# Altium PCB CAMERON.PcbDoc (part 1 of 2)
Units mil, origin at the board's own origin, x right, y up, seen from the top; angles counter-clockwise.
Board outline 6000 x 4900 mil, 4 copper layers (Top, POWER, GND, Bottom), stack 33.234 mil thick; 130 components, 117 nets, 635 pads, 146 vias.
Unrouted connection lines stored in the file: 34.
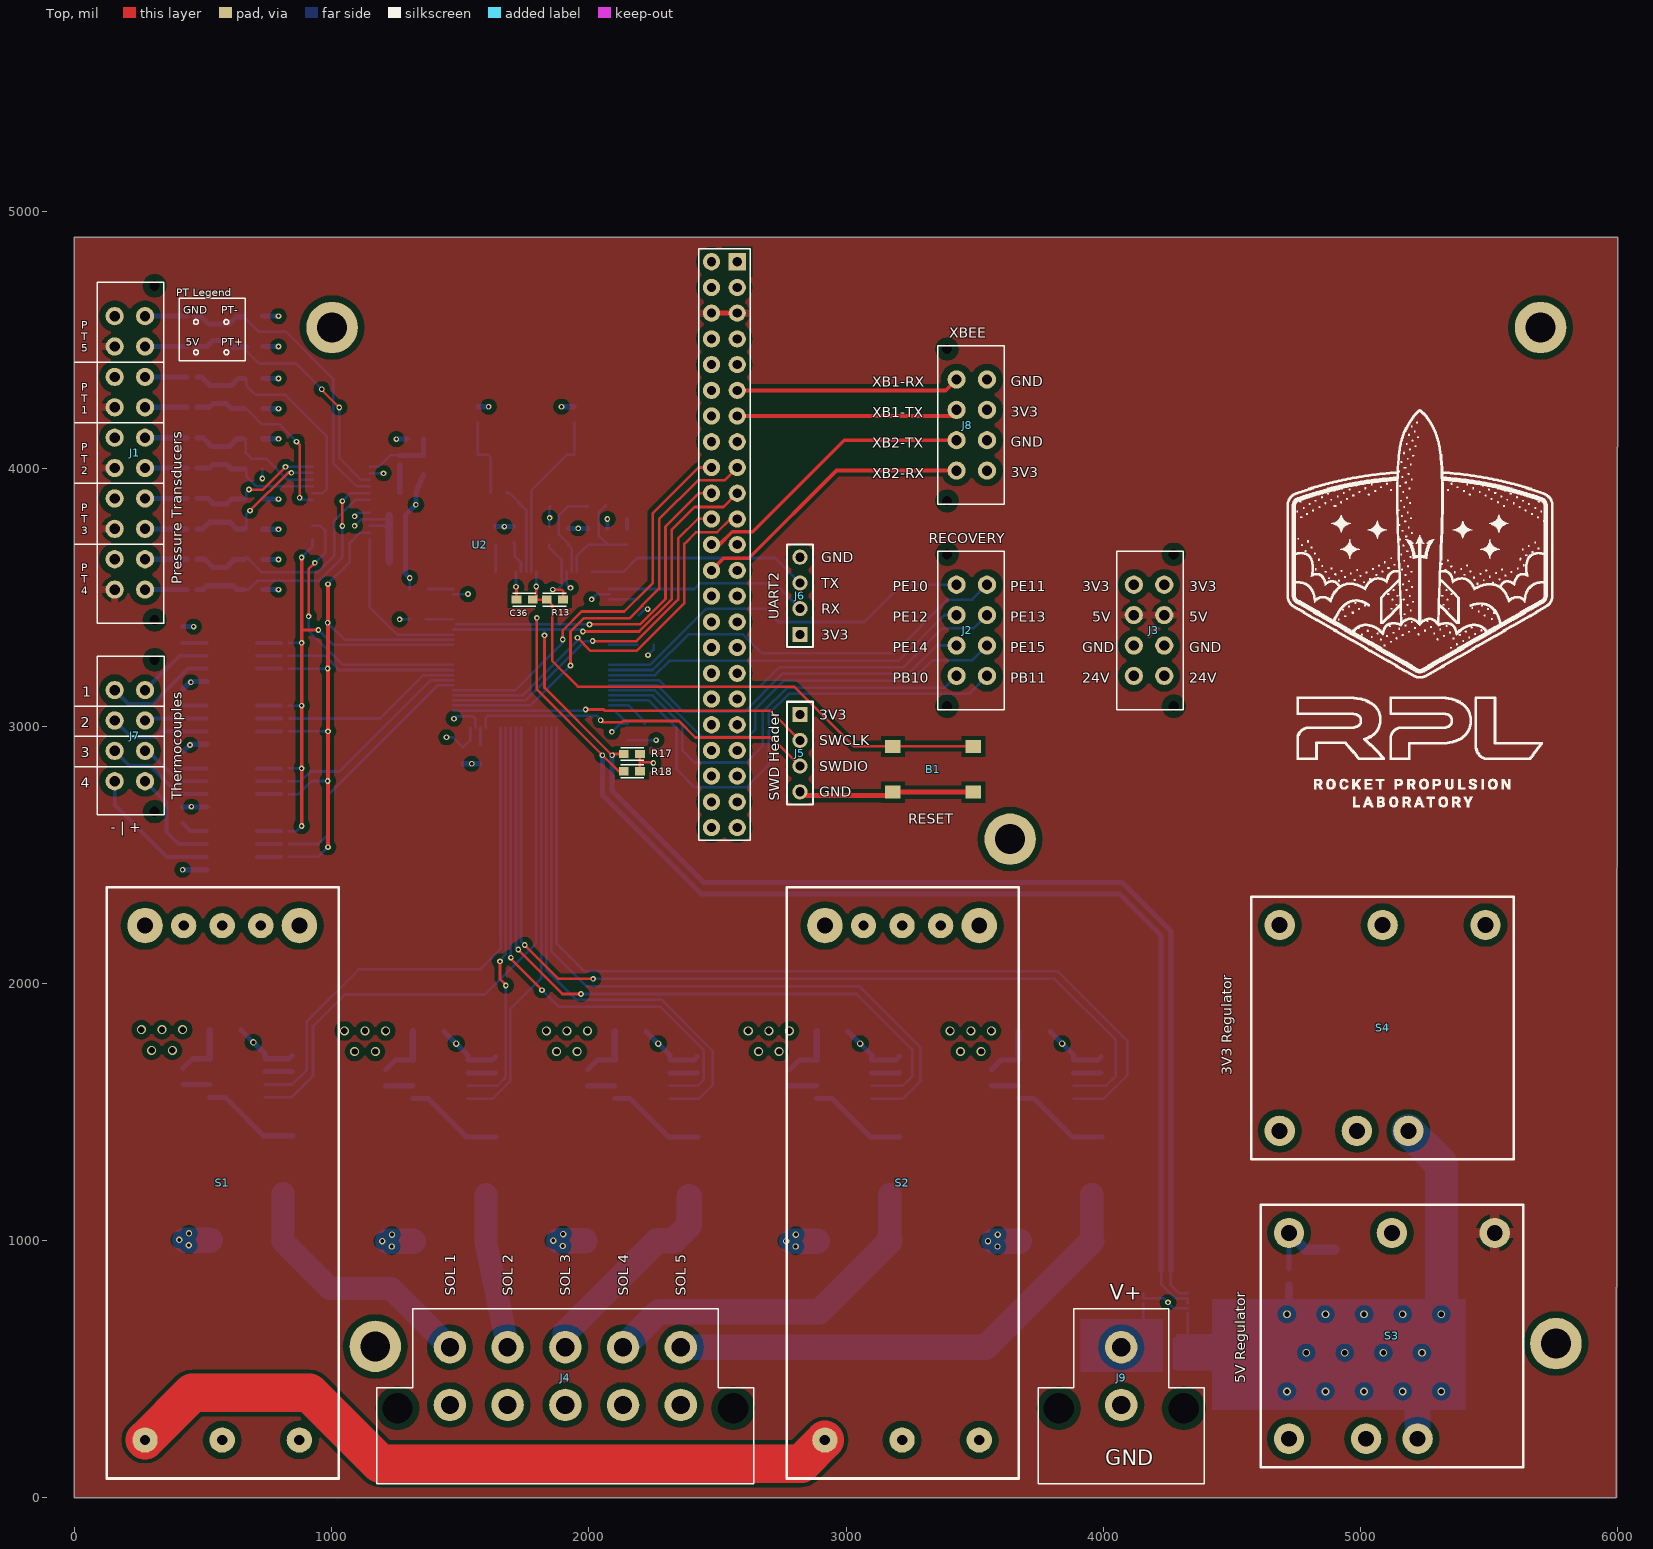
[diagram p0: Top view]
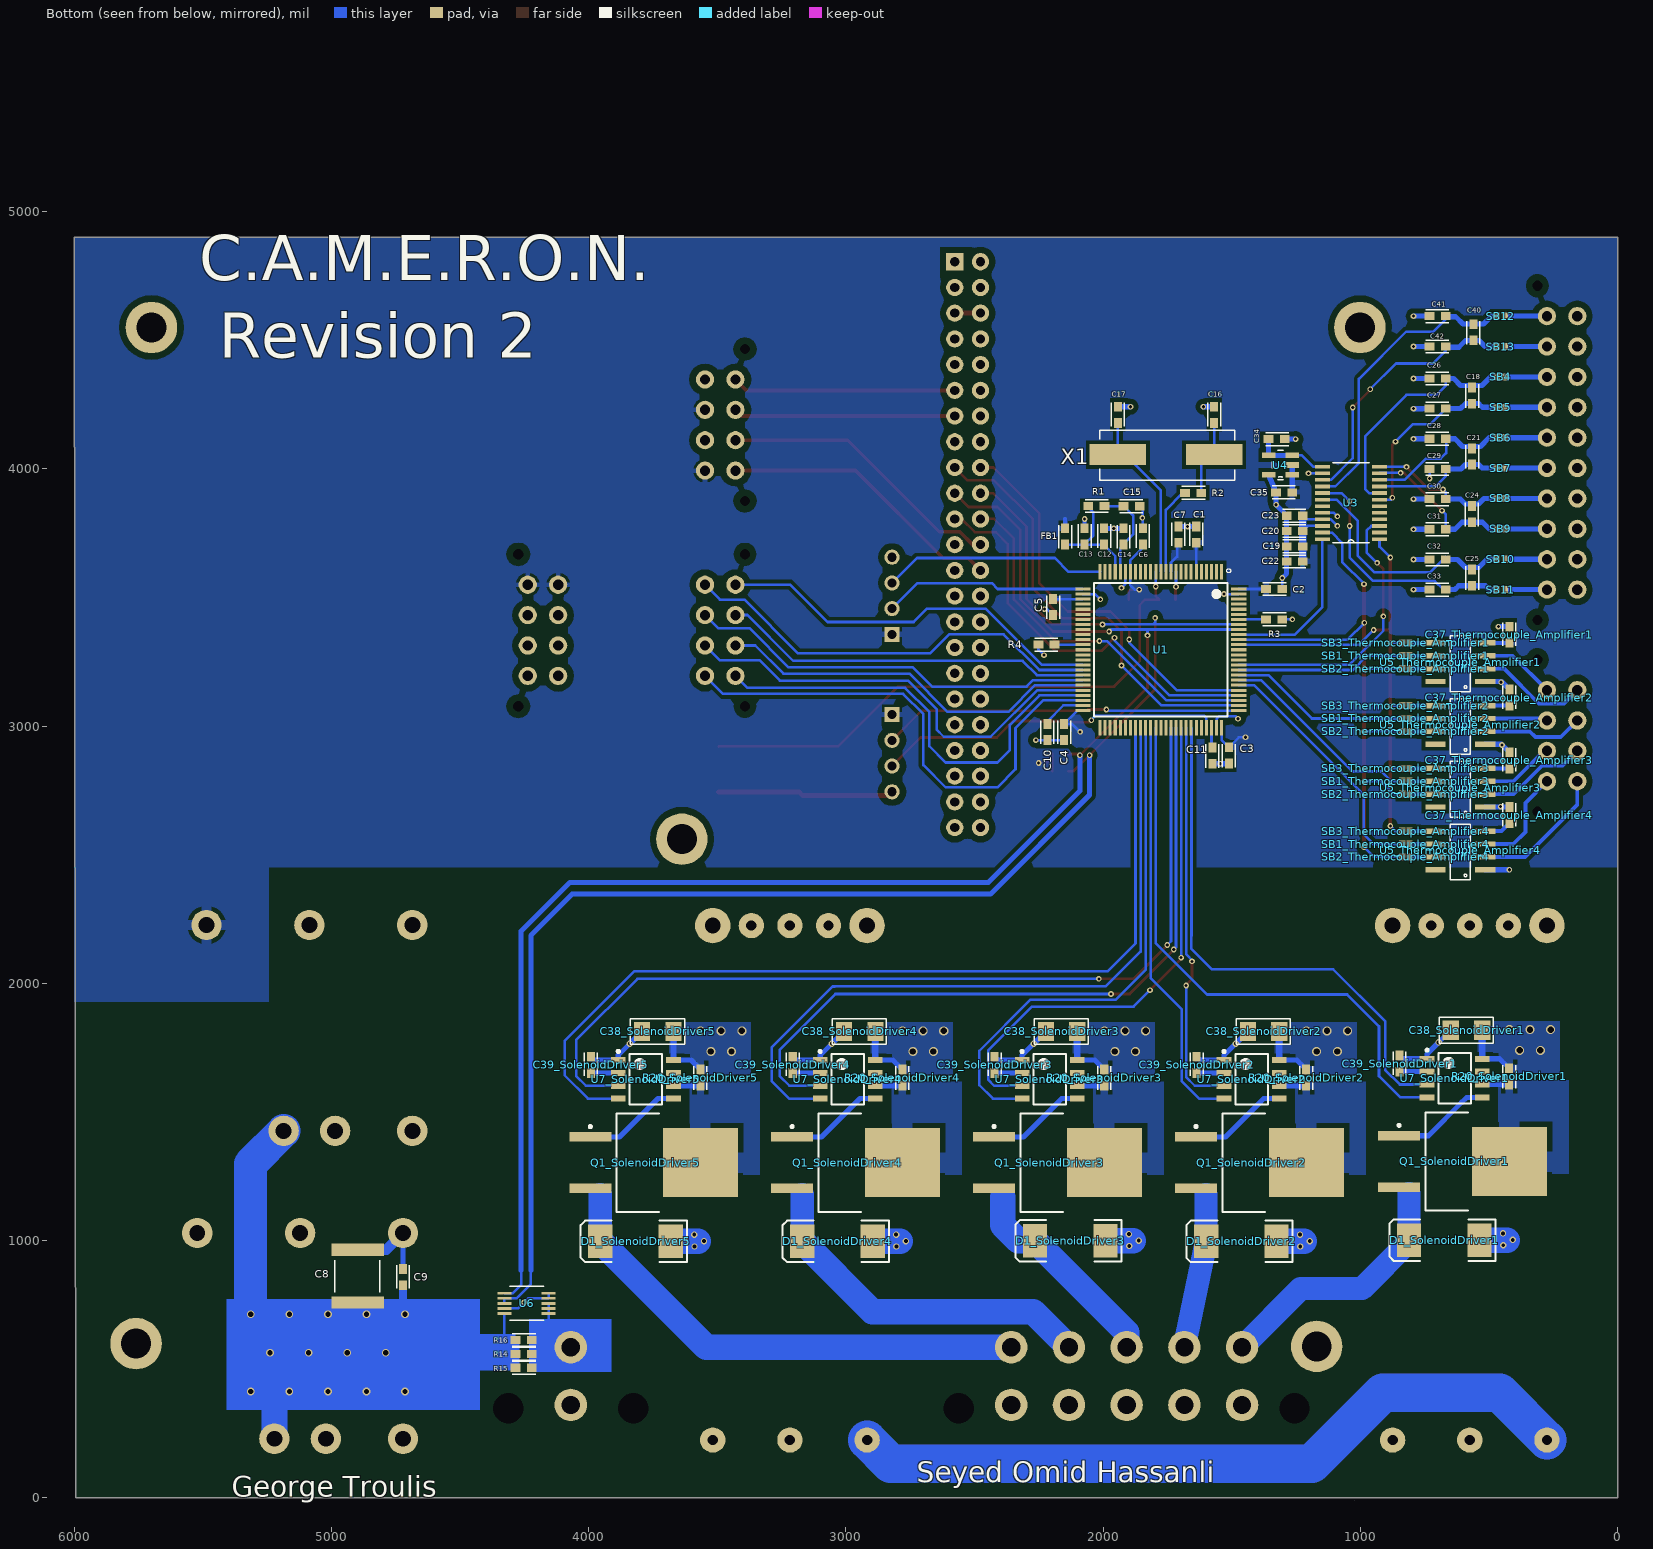
[diagram p1: Bottom view, seen from below]
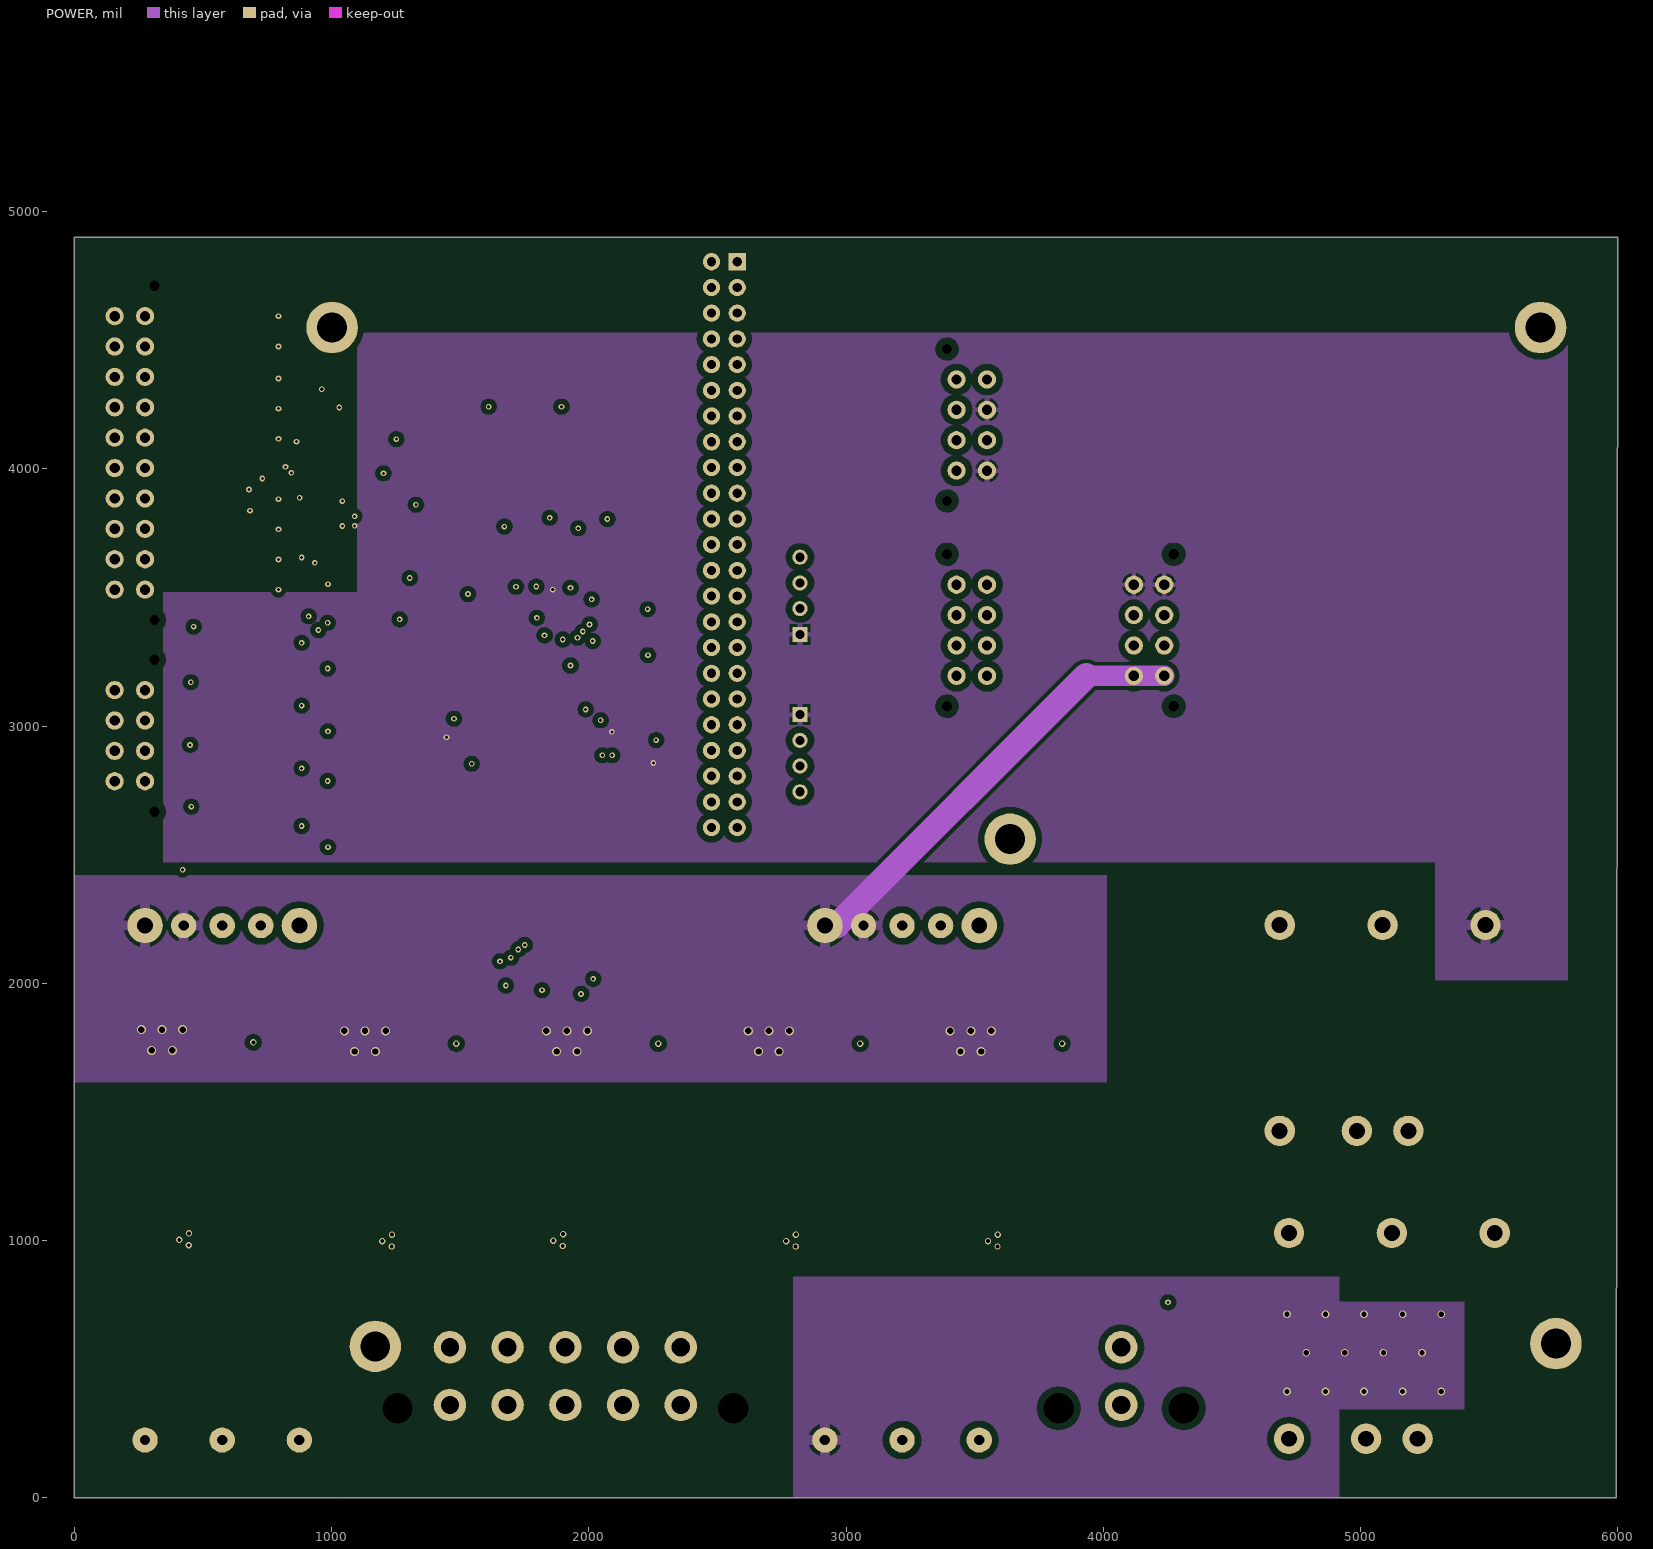
[diagram p2: POWER]
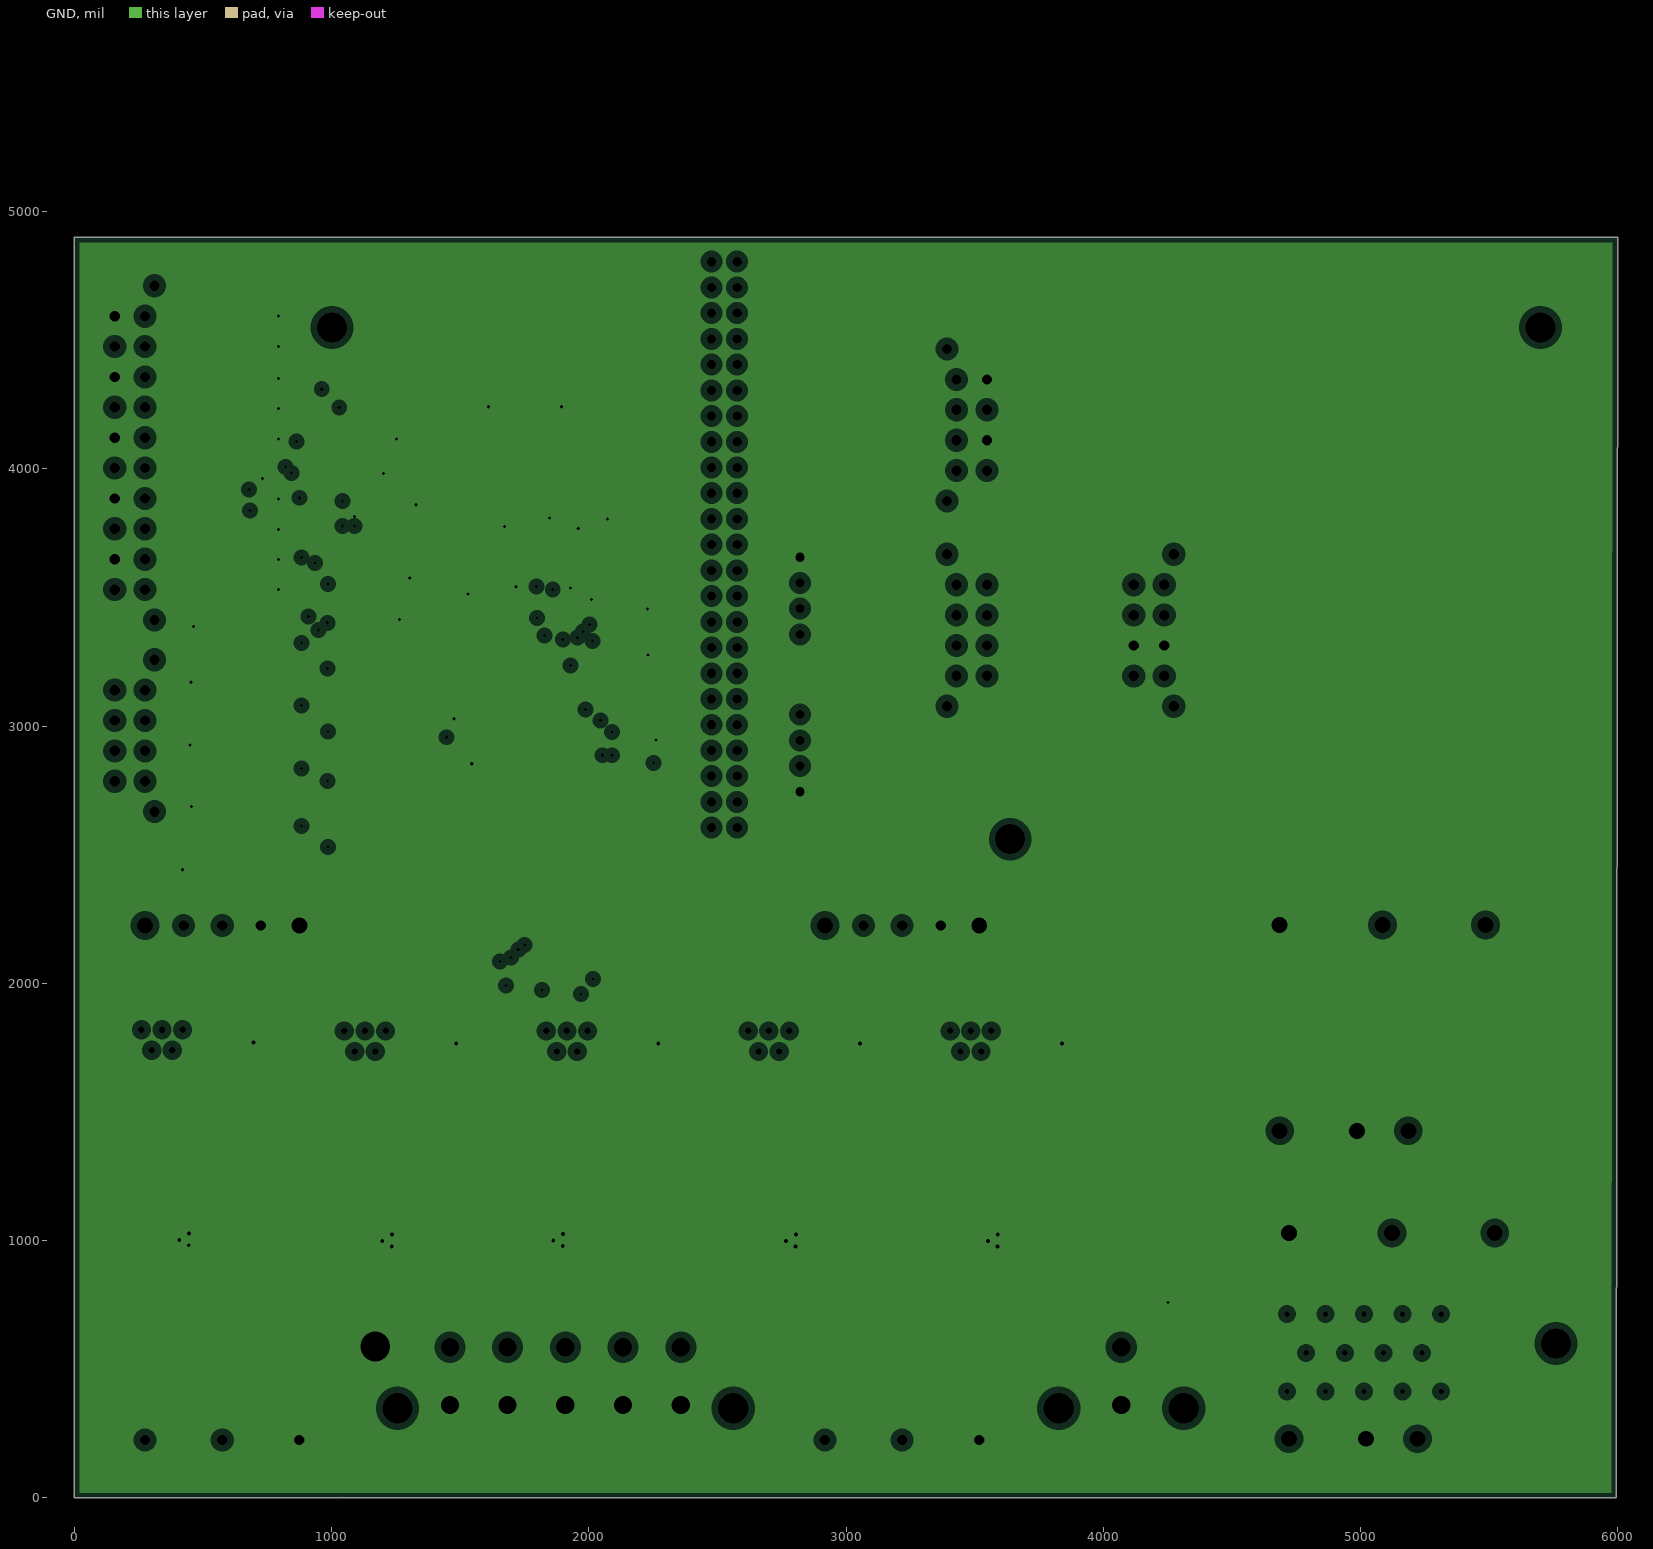
[diagram p3: GND, clearances drawn from the general rule]

## Layer stack, top to bottom
Top Solder: solder mask 0.4, Solder Resist, Dk 3.5
Top: signal copper 1.4
Dielectric 1: core 12.6, FR-4, Dk 4.8
POWER: signal copper 1.417
Dielectric 3: prepreg 5, Dk 4.2
GND: plane copper 1.417, net GND
Dielectric 2: core 10, Dk 4.2
Bottom: signal copper 1.4
Bottom Solder: solder mask 0.4, Solder Resist, Dk 3.5

## Board outline
0,0 0,4900 6000,4900 5995,0
cut-out: 1022,-12

## Design rules (kind name [scope] priority, off if disabled: settings)
Clearance "Stitching 3V3" [IsStitchingVia and InNet('3V3') vs (IsVia and (Not IsStitchingVia)) Or IsPad] p1: gap=5 ignorepadtopadclearanceinfootprint=FALSE
Clearance PolygonClearance [InPolygon] p2: gap=15 ignorepadtopadclearanceinfootprint=TRUE except(20: Via-Fill Via-Poly Via-Region; 25: THPad-Fill THPad-Poly THPad-Region Fill-Hole Poly-Hole Region-Hole)
Clearance [All] p3: gap=5 ignorepadtopadclearanceinfootprint=TRUE except(7: SMDPad-Fill SMDPad-Poly SMDPad-Region; 8: Arc-Fill Arc-Poly Arc-Region Track-Fill Track-Poly Track-Region Via-Fill Via-Poly Via-Region Fill-Fill Fill-Poly Fill-Region Poly-Poly Poly-Region Region-Region; 15: THPad-Fill THPad-Poly THPad-Region Fill-Hole Poly-Hole Region-Hole)
ComponentClearance [All] p1: gap=0 collisioncheckmode=3 verticalgap=0 showdistances=FALSE
HoleSize [All] p1: absolutevalues=TRUE maxlimit=250 minlimit=12 maxpercent=80.000 minpercent=20.000
MinimumAnnularRing [All] p1: minimumring=5
MinimumSolderMaskSliver [All] p1 off: minsoldermaskwidth=5
NetsToIgnore [InNetClass('SOL_FAULT[1..5]')  and InNetClass('SOL_OUT[1..5]')] p1:
PlaneClearance [All] p1: clearance=25
PlaneConnect PlaneConnect_GND [InNet('GND')] p1: pad.planeconnectstyle=Relief pad.reliefexpansion=20 pad.reliefentries=4 pad.reliefconductorwidth=40 pad.reliefairgap=20 via.planeconnectstyle=Direct via.reliefexpansion=20 via.reliefentries=4 via.reliefconductorwidth=40 via.reliefairgap=20
PlaneConnect [All] p2: pad.planeconnectstyle=Relief pad.reliefexpansion=20 pad.reliefentries=4 pad.reliefconductorwidth=30 pad.reliefairgap=20 via.planeconnectstyle=Direct via.reliefexpansion=20 via.reliefentries=4 via.reliefconductorwidth=30 via.reliefairgap=20
PolygonConnect PolygonConnect_MOSFET_Drain [InPadClass('MOSFET_DRAIN')] p1: thpad.connectstyle=Relief thpad.reliefconductorwidth=20 thpad.reliefentries=4 thpad.polygonreliefangle="90 Angle" thpad.airgapwidth=10 smdpad.connectstyle=Relief smdpad.reliefconductorwidth=80 smdpad.reliefentries=4 smdpad.polygonreliefangle="90 Angle" smdpad.airgapwidth=20 via.connectstyle=Direct via.reliefconductorwidth=20 via.reliefentries=4 via.polygonreliefangle="90 Angle" via.airgapwidth=10
PolygonConnect PolygonConnect_HiCurrent [InPadClass('REGULATORS_SOURCE')] p2: thpad.connectstyle=Relief thpad.reliefconductorwidth=40 thpad.reliefentries=4 thpad.polygonreliefangle="90 Angle" thpad.airgapwidth=15 smdpad.connectstyle=Relief smdpad.reliefconductorwidth=20 smdpad.reliefentries=4 smdpad.polygonreliefangle="90 Angle" smdpad.airgapwidth=10 via.connectstyle=Direct via.reliefconductorwidth=20 via.reliefentries=4 via.polygonreliefangle="90 Angle" via.airgapwidth=10
PolygonConnect PolygonConnect_3V3 [InNet('3V3')] p3: thpad.connectstyle=Relief thpad.reliefconductorwidth=20 thpad.reliefentries=4 thpad.polygonreliefangle="90 Angle" thpad.airgapwidth=10 smdpad.connectstyle=Relief smdpad.reliefconductorwidth=20 smdpad.reliefentries=4 smdpad.polygonreliefangle="90 Angle" smdpad.airgapwidth=10 via.connectstyle=Direct via.reliefconductorwidth=20 via.reliefentries=4 via.polygonreliefangle="90 Angle" via.airgapwidth=10
PolygonConnect [All] p4: thpad.connectstyle=Relief thpad.reliefconductorwidth=30 thpad.reliefentries=4 thpad.polygonreliefangle="90 Angle" thpad.airgapwidth=15 smdpad.connectstyle=Relief smdpad.reliefconductorwidth=30 smdpad.reliefentries=4 smdpad.polygonreliefangle="90 Angle" smdpad.airgapwidth=15 via.connectstyle=Direct via.reliefconductorwidth=30 via.reliefentries=4 via.polygonreliefangle="90 Angle" via.airgapwidth=15
RoomDefinition SolenoidDriver5 [InComponentClass('SolenoidDriver5')] p1: confinementstyle=ConfineIn formatcopy=TRUE lockcomponents=FALSE outline 4101.13,1890.28 3326.13,1890.28 3326.13,873.28 4101.13,873.28
RoomDefinition SolenoidDriver4 [InComponentClass('SolenoidDriver4')] p2: confinementstyle=ConfineIn formatcopy=TRUE lockcomponents=FALSE outline 3316.13,1890.28 2541.13,1890.28 2541.13,873.28 3316.13,873.28
RoomDefinition SolenoidDriver3 [InComponentClass('SolenoidDriver3')] p3: confinementstyle=ConfineIn formatcopy=TRUE lockcomponents=FALSE outline 2531.13,1890.28 1756.13,1890.28 1756.13,873.28 2531.13,873.28
RoomDefinition SolenoidDriver2 [InComponentClass('SolenoidDriver2')] p4: confinementstyle=ConfineIn formatcopy=TRUE lockcomponents=FALSE outline 1746.13,1890.28 971.13,1890.28 971.13,873.28 1746.13,873.28
RoomDefinition SolenoidDriver1 [InComponentClass('SolenoidDriver1')] p5: confinementstyle=ConfineIn formatcopy=FALSE lockcomponents=FALSE outline 957.13,1895 182.13,1895 182.13,878 957.13,878
RoutingVias [All] p1: holewidth=10 width=15 viastyle="Through Hole" minholewidth=8 minwidth=12 maxholewidth=50 maxwidth=100
SilkToSilkClearance [All] p1: silktosilkclearance=1
SilkToSolderMaskClearance [IsPad] p1: minsilkscreentomaskgap=5 clearancetoexposedcopper=TRUE
SolderMaskExpansion [All] p1: expansion=5
UnRoutedNet [All] p1: checkbadconnections=TRUE
Width [All] p1: maxlimit=200 minlimit=5 preferedwidth=10
22 further rules are at their usual default settings.

## Classes and differential pairs
pad class REGULATORS_SOURCE: S1-1 S1-7 S1-8 S2-1 S2-7 S2-8 S3-3 S4-3
pad class MOSFET_DRAIN: Q1_SolenoidDriver1-2 Q1_SolenoidDriver2-2 Q1_SolenoidDriver3-2 Q1_SolenoidDriver4-2 Q1_SolenoidDriver5-2
component class Recovery: J2 J3
net class SOL_PWR[1..5]: SOL_PWR1 SOL_PWR2 SOL_PWR3 SOL_PWR4 SOL_PWR5
net class SOL_OUT[1..5]: SOL_OUT1 SOL_OUT2 SOL_OUT3 SOL_OUT4 SOL_OUT5
net class SOL_FAULT[1..5]: SOL_FAULT1 SOL_FAULT2 SOL_FAULT3 SOL_FAULT4 SOL_FAULT5
component class Solenoids: J4
net class TC_CS[1..4]: TC_CS1 TC_CS2 TC_CS3 TC_CS4
net class T-[1..4]: T-1 T-2 T-3 T-4
net class T+[1..4]: T+1 T+2 T+3 T+4
channel class Solenoid_Driver: SolenoidDriver1 SolenoidDriver2 SolenoidDriver3 SolenoidDriver4 SolenoidDriver5 SolenoidDriver6 SolenoidDriver7
component class "XBee Radio": J8
component class Debugging/Programming: B1 C36 J5 J6 R13
component class SolenoidDriver5: C38_SolenoidDriver5 C39_SolenoidDriver5 D1_SolenoidDriver5 Q1_SolenoidDriver5 R20_SolenoidDriver5 R25 U5_SolenoidDriver5 U7_SolenoidDriver5
component class SolenoidDriver4: C38_SolenoidDriver4 C39_SolenoidDriver4 D1_SolenoidDriver4 Q1_SolenoidDriver4 R20_SolenoidDriver4 R25 U5_SolenoidDriver4 U7_SolenoidDriver4
component class SolenoidDriver3: C38_SolenoidDriver3 C39_SolenoidDriver3 D1_SolenoidDriver3 Q1_SolenoidDriver3 R20_SolenoidDriver3 R25 U5_SolenoidDriver3 U7_SolenoidDriver3
component class SolenoidDriver2: C38_SolenoidDriver2 C39_SolenoidDriver2 D1_SolenoidDriver2 Q1_SolenoidDriver2 R20_SolenoidDriver2 R25 U5_SolenoidDriver2 U7_SolenoidDriver2
component class SolenoidDriver1: C38_SolenoidDriver1 C39_SolenoidDriver1 D1_SolenoidDriver1 Q1_SolenoidDriver1 R20_SolenoidDriver1 R25 U5_SolenoidDriver1 U7_SolenoidDriver1
component class RIO_MCU: U1
component class "Pressure Transducers": C18 C19 C20 C21 C22 C23 C24 C25 C26 C27 C28 C29 C30 C31 C32 C33 C34 C35 C40 C41 C42 J1 SB4 SB5 SB6 SB7 SB8 SB9 SB10 SB11 SB12 SB13 U3 U4
component class Power_Monitor: J9 R14 R15 R16 R17 R18 U6
component class "Flight Computer": U2
channel class Thermocouple_Amplifier: Thermocouple_Amplifier1 Thermocouple_Amplifier2 Thermocouple_Amplifier3 Thermocouple_Amplifier4
component class Thermocouple_Amplifier4: C37_Thermocouple_Amplifier4 C? SB1_Thermocouple_Amplifier4 SB2_Thermocouple_Amplifier4 SB3_Thermocouple_Amplifier4 U5_Thermocouple_Amplifier4
component class Thermocouple_Amplifier3: C37_Thermocouple_Amplifier3 C? SB1_Thermocouple_Amplifier3 SB2_Thermocouple_Amplifier3 SB3_Thermocouple_Amplifier3 U5_Thermocouple_Amplifier3
component class Thermocouple_Amplifier2: C37_Thermocouple_Amplifier2 C? SB1_Thermocouple_Amplifier2 SB2_Thermocouple_Amplifier2 SB3_Thermocouple_Amplifier2 U5_Thermocouple_Amplifier2
component class Thermocouple_Amplifier1: C37_Thermocouple_Amplifier1 C? SB1_Thermocouple_Amplifier1 SB2_Thermocouple_Amplifier1 SB3_Thermocouple_Amplifier1 U5_Thermocouple_Amplifier1
component class Thermocouples: J7
component class Power: C1 C2 C3 C4 C5 C6 C7 C8 C9 C10 C11 C12 C13 C14 C15 C16 C17 FB1 R1 R2 R3 R4 S1 S2 S3 S4 X1

## Components (designator, comment, footprint, x,y, rotation, side; value= is the part's Value field where it differs from the comment)
B1 "Push Button" PUSHBUTTON 3182.01,2921 r0 top
C1 "" CAP_0603 1638.26,3776 r270 bottom value=1uF
C2 "" CAP_0603 1304.13,3533.37 r0 bottom value=100nF
C3 "" CAP_0603 1511.78,2855 r90 bottom value=100nF
C4 "" CAP_0603 2152,2946 r90 bottom value=100nF
C5 "" CAP_0603 2195,3432 r90 bottom value=100nF
C6 "" CAP_0603 1846,3769.13 r270 bottom value=100nF
C7 "" CAP_0603 1708,3776 r270 bottom value=100nF
C8 "Cap" 2220 4898,964.72 r270 bottom value=10uF
C9 "Cap" CAP_0603 4722,890 r270 bottom value=0.1uF
C10 "" CAP_0603 2217,2946 r90 bottom value=2.2uF
C11 "" CAP_0603 1576,2854 r90 bottom value=2.2uF
C12 "" CAP_0603 1996.67,3769.13 r270 bottom value=100nF
C13 "" CAP_0603 2072.33,3769.13 r270 bottom value=1uF
C14 "" CAP_0603 1921.33,3706.13 r90 bottom value=100nF
C15 "" CAP_0603 1921,3855 r180 bottom value=1uF
C16 "" CAP_0603 1569,4242 r270 bottom value=25pF
C17 "" CAP_0603 1943,4242 r270 bottom value=25pF
C18 "Cap" CAP_0603 566,4253.91 r90 bottom value=0.1uF
C19 "Cap" CAP_0603 1287,3699.33 r180 bottom value=0.1uF
C20 "Cap" CAP_0603 1287,3758.67 r180 bottom value=0.1uF
C21 "Cap" CAP_0603 566,4016.91 r90 bottom value=0.1uF
C22 "Cap" CAP_0603 1287,3640 r180 bottom value=0.1uF
C23 "Cap" CAP_0603 1287,3818 r180 bottom value=0.1uF
C24 "Cap" CAP_0603 567,3792.77 r90 bottom value=0.1uF
C25 "Cap" CAP_0603 566,3545.91 r90 bottom value=0.1uF
C26 "Cap" CAP_0603 731.31,4351.77 r180 bottom value=10pF
C27 "Cap" CAP_0603 731.31,4234.52 r180 bottom value=10pF
C28 "Cap" CAP_0603 731.31,4117.27 r180 bottom value=10pF
C29 "Cap" CAP_0603 731.31,4000.01 r180 bottom value=10pF
C30 "Cap" CAP_0603 731.31,3882.76 r180 bottom value=10pF
C31 "Cap" CAP_0603 731.31,3765.51 r180 bottom value=10pF
C32 "Cap" CAP_0603 731.31,3648.25 r180 bottom value=10pF
C33 "Cap" CAP_0603 731.31,3531 r180 bottom value=10pF
C34 "Cap" CAP_0603 1294,4116 r0 bottom value=0.1uF
C35 "Cap" CAP_0603 1328,3909 r180 bottom value=0.1uF
C36 "Cap" CAP_0603 1719,3492 r0 top value=100nF
C37_Thermocouple_Amplifier1 "Cap" CAP_0603 421,3387 r270 bottom value=100nF (schematic designator C37)
C37_Thermocouple_Amplifier2 "Cap" CAP_0603 421,3143 r270 bottom value=100nF (schematic designator C37)
C37_Thermocouple_Amplifier3 "Cap" CAP_0603 421,2899 r270 bottom value=100nF (schematic designator C37)
C37_Thermocouple_Amplifier4 "Cap" CAP_0603 421,2686 r270 bottom value=100nF (schematic designator C37)
C38_SolenoidDriver1 "Cap" 1206 648.76,1818 r180 bottom value=10uF (schematic designator C38)
C38_SolenoidDriver2 "Cap" 1206 1437.76,1813.28 r180 bottom value=10uF (schematic designator C38)
C38_SolenoidDriver3 "Cap" 1206 2222.76,1813.28 r180 bottom value=10uF (schematic designator C38)
C38_SolenoidDriver4 "Cap" 1206 3007.76,1813.28 r180 bottom value=10uF (schematic designator C38)
C38_SolenoidDriver5 "Cap" 1206 3792.76,1813.28 r180 bottom value=10uF (schematic designator C38)
C39_SolenoidDriver1 "Cap" CAP_0603 848,1720 r270 bottom value=1uF (schematic designator C39)
C39_SolenoidDriver2 "Cap" CAP_0603 1637,1715.28 r270 bottom value=1uF (schematic designator C39)
C39_SolenoidDriver3 "Cap" CAP_0603 2422,1715.28 r270 bottom value=1uF (schematic designator C39)
C39_SolenoidDriver4 "Cap" CAP_0603 3207,1715.28 r270 bottom value=1uF (schematic designator C39)
C39_SolenoidDriver5 "Cap" CAP_0603 3992,1715.28 r270 bottom value=1uF (schematic designator C39)
C40 "Cap" CAP_0603 561,4500 r90 bottom value=0.1uF
C41 "Cap" CAP_0603 731.31,4593.99 r180 bottom value=10pF
C42 "Cap" CAP_0603 731.31,4475.88 r180 bottom value=10pF
D1_SolenoidDriver1 "Diode" SMC 674.25,1002 r0 bottom (schematic designator D1)
D1_SolenoidDriver2 "Diode" SMC 1463.25,997.28 r0 bottom (schematic designator D1)
D1_SolenoidDriver3 "Diode" SMC 2128.25,999.28 r0 bottom (schematic designator D1)
D1_SolenoidDriver4 "Diode" SMC 3033.25,997.28 r0 bottom (schematic designator D1)
D1_SolenoidDriver5 "Diode" SMC 3818.25,997.28 r0 bottom (schematic designator D1)
FB1 "Ferrite Bead" 0603 2148,3706.13 r90 bottom
J1 "MicroFit 20-Pos Connector" Microfit-20Pos 157,4593.99 r270 top
J2 "MicroFit 8-Pos Connector" Microfit-8Pos#1 3355.87,3372.83 r90 top
J3 "MicroFit 8-Pos Connector" Microfit-8Pos#1 4311.13,3372.83 r270 top
J4 "MegaFit 10-Pos Connector" MegaFit-10Pos 2503.09,736.02 r180 top
J5 "Header 4" HDR1X4 2821,3045 r270 top
J6 "Header 4" HDR1X4 2821,3357 r90 top
J7 "MicroFit 8-Pos Connector" Microfit-8Pos#2 349.13,2963.17 r270 top
J8 "MicroFit 8-Pos Connector" Microfit-8Pos#1 3355.87,4170.83 r90 top
J9 "Mega-Fit 2Pos Connector" MegaFit-2Pos 4069.91,361.42 r180 top
Q1_SolenoidDriver1 "MOSFET-N" DPAK2 604,1308 r180 bottom (schematic designator Q1)
Q1_SolenoidDriver2 "MOSFET-N" DPAK2 1393,1303.28 r180 bottom (schematic designator Q1)
Q1_SolenoidDriver3 "MOSFET-N" DPAK2 2178,1303.28 r180 bottom (schematic designator Q1)
Q1_SolenoidDriver4 "MOSFET-N" DPAK2 2963,1303.28 r180 bottom (schematic designator Q1)
Q1_SolenoidDriver5 "MOSFET-N" DPAK2 3748,1303.28 r180 bottom (schematic designator Q1)
R1 "Res1" RES_0603 1995.13,3856 r0 bottom value=47
R2 "Res1" RES_0603 1619,3907 r0 bottom value=787
R3 "Res1" RES_0603 1304.13,3415.26 r0 bottom value=4.7k
R4 "Res1" RES_0603 2252,3317 r180 bottom value=4.7k
R13 "Res1" RES_0603 1837,3492 r0 top value=4.7K
R14 "Res" RES_0603 4222,560 r0 bottom value=0.06R
R15 "Res" RES_0603 4222,506 r0 bottom value=0.06R
R16 "Res" RES_0603 4222,614 r0 bottom value=0.06R
R17 "Res" RES_0603 2199,2892 r180 top value=4.7K
R18 "Res" RES_0603 2199,2825 r180 top value=4.7K
R20_SolenoidDriver1 "Res1" RES_0603 422,1607 r90 bottom value=0.05 (schematic designator R20)
R20_SolenoidDriver2 "Res1" RES_0603 1211,1602.28 r90 bottom value=0.05 (schematic designator R20)
R20_SolenoidDriver3 "Res1" RES_0603 1996,1602.28 r90 bottom value=0.05 (schematic designator R20)
R20_SolenoidDriver4 "Res1" RES_0603 2781,1602.28 r90 bottom value=0.05 (schematic designator R20)
R20_SolenoidDriver5 "Res1" RES_0603 3566,1602.28 r90 bottom value=0.05 (schematic designator R20)
S1 "24V Buck Converter" UWE-24/3-Q12 575,1225 r90 top
S2 "24V Buck Converter" UWE-24/3-Q12 3218,1225 r90 top locked
S3 "5V Buck Converter" SPM15-050-Q12P-C 5122,630 r90 top
S4 "3V3 Buck Converter" SPM15-033-Q48N-C 5086,1827 r90 top
SB1_Thermocouple_Amplifier1 "Solder Bridge" "Solder Bridge" 822.87,3274 r0 bottom (schematic designator SB1)
SB1_Thermocouple_Amplifier2 "Solder Bridge" "Solder Bridge" 822.87,3030 r0 bottom (schematic designator SB1)
SB1_Thermocouple_Amplifier3 "Solder Bridge" "Solder Bridge" 822.87,2786 r0 bottom (schematic designator SB1)
SB1_Thermocouple_Amplifier4 "Solder Bridge" "Solder Bridge" 822.87,2542 r0 bottom (schematic designator SB1)
SB2_Thermocouple_Amplifier1 "Solder Bridge" "Solder Bridge" 822.87,3224 r0 bottom (schematic designator SB2)
SB2_Thermocouple_Amplifier2 "Solder Bridge" "Solder Bridge" 822.87,2980 r0 bottom (schematic designator SB2)
SB2_Thermocouple_Amplifier3 "Solder Bridge" "Solder Bridge" 822.87,2736 r0 bottom (schematic designator SB2)
SB2_Thermocouple_Amplifier4 "Solder Bridge" "Solder Bridge" 822.87,2492 r0 bottom (schematic designator SB2)
SB3_Thermocouple_Amplifier1 "Solder Bridge" "Solder Bridge" 822.87,3324 r0 bottom (schematic designator SB3)
SB3_Thermocouple_Amplifier2 "Solder Bridge" "Solder Bridge" 822.87,3080 r0 bottom (schematic designator SB3)
SB3_Thermocouple_Amplifier3 "Solder Bridge" "Solder Bridge" 822.87,2836 r0 bottom (schematic designator SB3)
SB3_Thermocouple_Amplifier4 "Solder Bridge" "Solder Bridge" 822.87,2592 r0 bottom (schematic designator SB3)
SB4 "Res" SB-2pos 458.31,4357.77 r0 bottom value=0R
SB5 "Res" SB-2pos 458.31,4239.66 r0 bottom value=0R
SB6 "Res" SB-2pos 458.31,4121.55 r0 bottom value=0R
SB7 "Res" SB-2pos 458.31,4003.44 r0 bottom value=0R
SB8 "Res" SB-2pos 458.31,3885.33 r0 bottom value=0R
SB9 "Res" SB-2pos 458.31,3767.22 r0 bottom value=0R
SB10 "Res" SB-2pos 458.31,3649.11 r0 bottom value=0R
SB11 "Res" SB-2pos 458.31,3531 r0 bottom value=0R
SB12 "Res" SB-2pos 458.32,4593.99 r0 bottom value=0R
SB13 "Res" SB-2pos 458.32,4475.88 r0 bottom value=0R
U1 "STM32F407xx" LQFP100 1776.06,3297.15 r270 bottom locked
U2 "BeagleBone Black" BeagleBoneBlack 1378,3731 r270 top locked
U3 "AD7794BRUZ" RU_24 1037,3868 r0 bottom value=Value
U4 "ADR391AUJZ-R2" UJ_5 1311,4015.35 r0 bottom value=Value
U5_Thermocouple_Amplifier1 "Thermocouple to Digital Converter" "8-SOIC MAXIM" 612,3174 r0 bottom (schematic designator U5)
U5_Thermocouple_Amplifier2 "Thermocouple to Digital Converter" "8-SOIC MAXIM" 612,2930 r0 bottom (schematic designator U5)
U5_Thermocouple_Amplifier3 "Thermocouple to Digital Converter" "8-SOIC MAXIM" 612,2686 r0 bottom (schematic designator U5)
U5_Thermocouple_Amplifier4 "Thermocouple to Digital Converter" "8-SOIC MAXIM" 612,2442 r0 bottom (schematic designator U5)
U6 "LTC4151IMS-1#PBF" MSOP-10_MS 4242,756.32 r0 bottom value=Value
U7_SolenoidDriver1 "MOSFET Driver" PSO-8 634,1632 r180 bottom value=Value (schematic designator U7)
U7_SolenoidDriver2 "MOSFET Driver" PSO-8 1423,1627.28 r180 bottom value=Value (schematic designator U7)
U7_SolenoidDriver3 "MOSFET Driver" PSO-8 2208,1627.28 r180 bottom value=Value (schematic designator U7)
U7_SolenoidDriver4 "MOSFET Driver" PSO-8 2993,1627.28 r180 bottom value=Value (schematic designator U7)
U7_SolenoidDriver5 "MOSFET Driver" PSO-8 3778,1627.28 r180 bottom value=Value (schematic designator U7)
X1 "XTAL" OSC_8MHz 1569,4056 r0 bottom

## Footprints (in the part's own frame and the unit in brackets; to place one, negate y for a bottom-side part, rotate by r counter-clockwise, add the part's x,y. Pads: shape width x height; smd on the part's side, far side on the other; paste and mask are expansions set on the pad)
"8-SOIC MAXIM" [mm] "Thermocouple Amplifier, Maxim Land Pattern 90-0096"
  rect 1.98x0.53 smd: 1(-2.465,0) 2(-2.465,-1.27) 3(-2.465,-2.54) 4(-2.465,-3.81) 5(2.465,-3.81) 6(2.465,-2.54) 7(2.465,-1.27) 8(2.465,0)
  silkscreen extent -1,-4.5 1,1
0603 [mil]
  rect 38x31.5 smd: 1(0,0) 2(63,0)
  silkscreen extent -15,-25 75,25
1206 [mm]
  rect 1.6x1.9 smd: 1(0,0) 2(3.1,0)
  silkscreen extent -1.14,-1.27 4.19,1.27
2220 [mm]
  rect 1.2x5.2 smd: 1(0,0) 2(5.2,0)
  silkscreen extent 1.02,-2.29 4.19,2.16
BeagleBoneBlack [mm]
  rect 1.7x1.7 hole 0.9 mask+0.051: 1(-27.297,30.458)
  round 1.7 hole 0.9 mask+0.051: 2(-27.297,27.918) 3(-24.757,30.458) 4(-24.757,27.918) 5(-22.217,30.458) 6(-22.217,27.918) 7(-19.677,30.458) 8(-19.677,27.918) 9(-17.137,30.458) 10(-17.137,27.918) 11(-14.597,30.458) 12(-14.597,27.918) 13(-12.057,30.458) 14(-12.057,27.918) 15(-9.517,30.458) 16(-9.517,27.918) 17(-6.977,30.458) 18(-6.977,27.918) 19(-4.437,30.458) 20(-4.437,27.918) 21(-1.897,30.458) 22(-1.897,27.918) 23(0.643,30.458) 24(0.643,27.918) 25(3.183,30.458) 26(3.183,27.918) 27(5.723,30.458) 28(5.723,27.918) 29(8.263,30.458) 30(8.263,27.918) 31(10.803,30.458) 32(10.803,27.918) 33(13.343,30.458) 34(13.343,27.918) 35(15.883,30.458) 36(15.883,27.918) 37(18.423,30.458) 38(18.423,27.918) 39(20.963,30.458) 40(20.963,27.918) 41(23.503,30.458) 42(23.503,27.918) 43(26.043,30.458) 44(26.043,27.918) 45(28.583,30.458) 46(28.583,27.918)
  rect 1.524x1.524 on Mech13 mask+0.051: NONE(-27.297,-20.342)
  round 1.524 on Mech13 mask+0.051: NONE(-27.297,-17.802) NONE(-24.757,-20.342) NONE(-24.757,-17.802) NONE(-22.217,-20.342) NONE(-22.217,-17.802) NONE(-19.677,-20.342) NONE(-19.677,-17.802) NONE(-17.137,-20.342) NONE(-17.137,-17.802) NONE(-14.597,-20.342) NONE(-14.597,-17.802) NONE(-12.057,-17.802) NONE(-12.057,-20.342) NONE(-9.517,-17.802) NONE(-9.517,-20.342) NONE(-6.977,-17.802) NONE(-6.977,-20.342) NONE(-4.437,-20.342) NONE(-4.437,-17.802) NONE(-1.897,-17.802) NONE(-1.897,-20.342) NONE(0.643,-17.802) NONE(0.643,-20.342) NONE(3.183,-17.802) NONE(3.183,-20.342) NONE(5.723,-20.342) NONE(5.723,-17.802) NONE(8.263,-17.802) NONE(8.263,-20.342) NONE(10.803,-17.802) NONE(10.803,-20.342) NONE(13.343,-20.342) NONE(13.343,-17.802) NONE(15.883,-20.342) NONE(15.883,-17.802) NONE(18.423,-20.342) NONE(18.423,-17.802) NONE(20.963,-20.342) NONE(20.963,-17.802) NONE(23.503,-20.342) NONE(23.503,-17.802) NONE(26.043,-20.342) NONE(26.043,-17.802) NONE(28.583,-20.342) NONE(28.583,-17.802)
  silkscreen extent -28.57,26.65 29.85,31.73
CAP_0603 [mil]
  rect 38x31.5 smd: 1(0,0) 2(63,0)
  silkscreen extent -15,-25 75,25, body extent -3,-16 65,16, height 25
DPAK2 [mm] "D2-PAK, 3-Pads, Body 7.93x8.19mm (max), IPC Medium Density"
  rect 4.15x0.95 smd: 1(-6.25,2.54) 3(-6.25,-2.54)
  rect 7.4x6.8 smd: 2(4.65,0)
  silkscreen extent -6.38,-4.85 0.55,4.85, body extent -3.65,-4.82 6,4.82, height 4.83
HDR1X4 [mm] "Connector; Header; 4 Position"
  rect 1.5x1.5 hole 0.9: 1(0,0)
  round 1.5 hole 0.9: 2(2.54,0) 3(5.08,0) 4(7.62,0)
  silkscreen extent -1.27,-1.27 8.89,1.27
LQFP100 [mm]
  rect 1.5x0.3 smd: 1(-7.7,6) 2(-7.7,5.5) 3(-7.7,5) 4(-7.7,4.5) 5(-7.7,4) 6(-7.7,3.5) 7(-7.7,3) 8(-7.7,2.5) 9(-7.7,2) 10(-7.7,1.5) 11(-7.7,1) 12(-7.7,0.5) 13(-7.7,0) 14(-7.7,-0.5) 15(-7.7,-1) 16(-7.7,-1.5) 17(-7.7,-2) 18(-7.7,-2.5) 19(-7.7,-3) 20(-7.7,-3.5) 21(-7.7,-4) 22(-7.7,-4.5) 23(-7.7,-5) 24(-7.7,-5.5) 25(-7.7,-6) 51(7.7,-6) 52(7.7,-5.5) 53(7.7,-5) 54(7.7,-4.5) 55(7.7,-4) 56(7.7,-3.5) 57(7.7,-3) 58(7.7,-2.5) 59(7.7,-2) 60(7.7,-1.5) 61(7.7,-1) 62(7.7,-0.5) 63(7.7,0) 64(7.7,0.5) 65(7.7,1) 66(7.7,1.5) 67(7.7,2) 68(7.7,2.5) 69(7.7,3) 70(7.7,3.5) 71(7.7,4) 72(7.7,4.5) 73(7.7,5) 74(7.7,5.5) 75(7.7,6)
  rect 0.3x1.5 smd: 26(-6,-7.7) 27(-5.5,-7.7) 28(-5,-7.7) 29(-4.5,-7.7) 30(-4,-7.7) 31(-3.5,-7.7) 32(-3,-7.7) 33(-2.5,-7.7) 34(-2,-7.7) 35(-1.5,-7.7) 36(-1,-7.7) 37(-0.5,-7.7) 38(0,-7.7) 39(0.5,-7.7) 40(1,-7.7) 41(1.5,-7.7) 42(2,-7.7) 43(2.5,-7.7) 44(3,-7.7) 45(3.5,-7.7) 46(4,-7.7) 47(4.5,-7.7) 48(5,-7.7) 49(5.5,-7.7) 50(6,-7.7) 76(6,7.7) 77(5.5,7.7) 78(5,7.7) 79(4.5,7.7) 80(4,7.7) 81(3.5,7.7) 82(3,7.7) 83(2.5,7.7) 84(2,7.7) 85(1.5,7.7) 86(1,7.7) 87(0.5,7.7) 88(0,7.7) 89(-0.5,7.7) 90(-1,7.7) 91(-1.5,7.7) 92(-2,7.7) 93(-2.5,7.7) 94(-3,7.7) 95(-3.5,7.7) 96(-4,7.7) 97(-4.5,7.7) 98(-5,7.7) 99(-5.5,7.7) 100(-6,7.7)
  silkscreen extent -8,-6.6 6.6,6.9
MegaFit-2Pos [mm] "Molex MegaFit-2Pos"
  round 3.2 hole 1.8: 1(0,-5.7) 2(0,0)
  round 1 hole 3 unplated: NONE(-6.17,0.325) NONE(6.17,0.325)
  silkscreen extent -8.2,-9.52 8.2,7.77, body extent -7.7,-9.02 7.7,5.02, height 14.81
MegaFit-10Pos [mm] "Molex MegaFit-10Pos"
  round 3.2 hole 1.8: 1(3.69,3.815) 2(3.69,9.515) 3(9.39,3.815) 4(9.39,9.515) 5(15.09,3.815) 6(15.09,9.515) 7(20.79,3.815) 8(20.79,9.515) 9(26.49,3.815) 10(26.49,9.515)
  round 1 hole 3 unplated: NONE(-1.48,9.84) NONE(31.66,9.84)
  silkscreen extent -3.51,0 33.69,17.28, body extent -3.01,0.51 33.24,14.54, height 14.82
Microfit-8Pos#1 [mm]
  round 1.8 hole 1.02: 1(-4.5,-4.88) 2(-4.5,-1.88) 3(-1.5,-4.88) 4(-1.5,-1.88) 5(1.5,-4.88) 6(1.5,-1.88) 7(4.5,-4.88) 8(4.5,-1.88)
  round 0 hole 1.02: NONE(-7.5,-0.94) NONE(7.5,-0.94)
  silkscreen extent -7.82,-6.58 7.83,0, body extent -8.07,-7.35 8.08,1.42, height 9.92
Microfit-8Pos#2 [mm]
  round 1.8 hole 1.02: 1(-4.5,-4.88) 2(-4.5,-1.88) 3(-1.5,-4.88) 4(-1.5,-1.88) 5(1.5,-4.88) 6(1.5,-1.88) 7(4.5,-4.88) 8(4.5,-1.88)
  round 0 hole 1.02 unplated: NONE(-7.5,-0.94) NONE(7.5,-0.94)
  silkscreen extent -7.83,-6.58 7.83,0, body extent -8.07,-7.35 8.08,1.42, height 9.92
Microfit-20Pos [mm]
  round 1.8 hole 1.02 unplated: 1(0,0) 2(0,3) 3(3,0) 4(3,3) 5(6,0) 6(6,3) 7(9,0) 8(9,3) 9(12,0) 10(12,3) 11(15,0) 12(15,3) 13(18,0) 14(18,3) 15(21,0) 16(21,3) 17(24,0) 18(24,3) 19(27,0) 20(27,3)
  round 0 hole 1.02 unplated: NONE(-3,3.94) NONE(30,3.94)
  silkscreen extent -3.32,-1.7 30.35,4.87, body extent -3.55,-2.38 30.6,6.38, height 9.92
MSOP-10_MS [mil]
  rect 55x11 smd: 1(-86,39.4) 2(-86,19.7) 3(-86,0) 4(-86,-19.7) 5(-86,-39.4) 6(86,-39.4) 7(86,-19.7) 8(86,0) 9(86,19.7) 10(86,39.4)
  silkscreen extent -66,-66 66,66, body extent -100,-61 100,61, height 43
OSC_8MHz [mil]
  rect 220x83 smd: 1(0,0) 2(374,0)
  silkscreen extent -80,-95 445,100
PSO-8 [mm] "SOP, 8-Leads, Body 4.90x3.90mm, Pitch 1.27mm, IPC Medium Density"
  rect 1.45x0.6 smd: 1(-2.725,1.905) 2(-2.725,0.635) 3(-2.725,-0.635) 4(-2.725,-1.905) 5(2.725,-1.905) 6(2.725,-0.635) 7(2.725,0.635) 8(2.725,1.905)
  silkscreen extent -2.85,-2.5 1.6,2.88, body extent -3,-2.5 3,2.5, height 1.75
PUSHBUTTON [mm]
  rect 1.55x1.3 smd: 1(0,0) 1(7.95,0) 2(0,-4.5) 2(7.95,-4.5)
RES_0603 [mil]
  rect 38x31.5 smd: 1(0,0) 2(63,0)
  silkscreen extent -15,-25 75,25, body extent -3,-16 65,16, height 15
RU_24 [mil]
  rect 58x14 smd: 1(-111,140.75) 2(-111,115.16) 3(-111,89.57) 4(-111,63.98) 5(-111,38.39) 6(-111,12.8) 7(-111,-12.8) 8(-111,-38.39) 9(-111,-63.98) 10(-111,-89.57) 11(-111,-115.16) 12(-111,-140.75) 13(111,-140.75) 14(111,-115.16) 15(111,-89.57) 16(111,-63.98) 17(111,-38.39) 18(111,-12.8) 19(111,12.8) 20(111,38.39) 21(111,63.98) 22(111,89.57) 23(111,115.16) 24(111,140.75)
  silkscreen extent -72,-156 72,156, body extent -126,-156 126,156, height 47
SB-2pos [mm]
  rect 0.6x0.7 smd: 1(-0.5,0) 2(0.3,0)
SMC [mm] "DO-214-AB/SMC; 2 C-Bend Leads; Body 7.9 x 5.9 mm, inc. leads (LxW)"
  rect 2.4x3.3 smd: 1(-3.475,0) 2(3.475,0)
  silkscreen extent -5.08,-2.05 5.42,2.06
"Solder Bridge" [mm]
  rect 0.6x0.7 smd paste+0 mask+0: 1(-0.35,0)
  rect 0.6x0.7 smd paste+0 mask+0.102: 2(0.375,0)
SPM15-033-Q48N-C [mm] "Isolated Module DC DC Converter 1 Output 3.3V 4.5A 18V - 75V Input, 6-DIP Module"
  round 3 hole 1.575: 1(-10.16,-2.54) 2(-10.16,2.54) 3(10.16,-10.16) 4(10.16,0) 5(10.16,10.16) 6(-10.16,10.16)
  silkscreen extent -12.96,-12.96 12.96,12.96
SPM15-050-Q12P-C [mm] "Isolated Module DC DC Converter 1 Output 5V 3A 9V - 36V Input, 6-DIP Module"
  round 3 hole 1.575: 1(-10.16,-2.54) 2(-10.16,2.54) 3(10.16,-10.16) 4(10.16,0) 5(10.16,10.16) 6(-10.16,10.16)
  silkscreen extent -12.96,-12.96 12.96,12.96
UJ_5 [mil]
  rect 52x22 smd: 1(-46,37.4) 2(-46,0) 3(-46,-37.4) 4(46,-37.4) 5(46,37.4)
  silkscreen extent -10,-57 32,57, body extent -55,-57 55,57, height 39
UWE-24/3-Q12 [mm] "Isolated Module DC DC Converter 1 Output 24V 3A 9V - 36V Input, 8-DIP Module, 1/8 Brick"
  round 2.5 hole 1.022: 1(-25.4,7.62) 2(-25.4,0) 3(-25.4,-7.62) 5(25.4,-3.81) 6(25.4,0) 7(25.4,3.81)
  round 3.5 hole 1.572: 4(25.4,-7.62) 8(25.4,7.62)
  silkscreen extent -29.2,-11.5 29.2,11.4

## Part data
B1: library part PushButton
C1 C2 C3 C4 C5 C6 C7 C10 C11 C12 C13 C14 C15 C16 C17: library part Cap, "Capacitor"
C8 C9 C38_SolenoidDriver1 C38_SolenoidDriver2 C38_SolenoidDriver3 C38_SolenoidDriver4 C38_SolenoidDriver5: "Capacitor", Voltage=100V
  C8 C9: LatestRevisionDate=17-Jul-2002, LatestRevisionNote="Re-released for DXP Platform.", PackageDescription="Radial Cap, Thru-Hole; 2 Leads; 0.3 in Pin Spacing", PackageReference=RAD-0.3, Published=8-Jun-2000, Publisher="Altium Limited"
C36 C37_Thermocouple_Amplifier1 C37_Thermocouple_Amplifier2 C37_Thermocouple_Amplifier3 C37_Thermocouple_Amplifier4 C39_SolenoidDriver1 C39_SolenoidDriver2 C39_SolenoidDriver3 C39_SolenoidDriver4 C39_SolenoidDriver5: "Capacitor"
D1_SolenoidDriver1 D1_SolenoidDriver2 D1_SolenoidDriver3 D1_SolenoidDriver4 D1_SolenoidDriver5: "Default Diode"
J1: library part "Micro-Fit 20Pos", "Molex MicroFit 20-Pos Connector", DigiKey PN=WM10719-ND, URL=https://www.digikey.com/product-detail/en/molex-llc/0430451628/WM10719-ND/3310256
J2 J3 J7 J8: library part "Micro-Fit 8Pos", "Molex MicroFit 8-Pos Connector", DigiKey PN=WM2651-ND, URL=https://www.digikey.com/products/en?WT.z_cid=sp_900_0310_buynow&keywords=430450813
J4: library part "Mega-Fit 10Pos", "Molex MegaFit 10-Pos Connector", DigiKey PN=WM11979-ND, URL=https://www.digikey.com/product-detail/en/molex-llc/0768290010/WM11979-ND/5639621
J5 J6: "Header, 4-Pin", LatestRevisionDate=17-Jul-2002, LatestRevisionNote="Re-released for DXP Platform.", Publisher="Altium Limited"
J9: library part "Mega-Fit 2Pos", "Molex MegaFit 2-Pos Connector", DigiKey PN=WM11979-ND, URL=https://www.digikey.com/product-detail/en/molex-llc/0768290010/WM11979-ND/5639621
Q1_SolenoidDriver1 Q1_SolenoidDriver2 Q1_SolenoidDriver3 Q1_SolenoidDriver4 Q1_SolenoidDriver5: "N-Channel MOSFET", ComponentLink1Description="DigiKey URL", ComponentLink1URL=https://www.digikey.com/product-detail/en/infineon-technologies/IRFZ34NSTRLPBF/IRFZ34NSTRLPBFCT-ND/2441060, DigiKey PN=IRFZ34NSTRLPBFCT-ND
R1 R2 R3 R4 R13 R20_SolenoidDriver1 R20_SolenoidDriver2 R20_SolenoidDriver3 R20_SolenoidDriver4 R20_SolenoidDriver5: "Resistor"
S1 S2: library part UWE-24/3-Q12PB-C, "CONV DC/DC 72W 24V 3A", Link=https://www.digikey.com/product-detail/en/murata-power-solutions-inc/UWE-24-3-Q12PB-C/811-2236-5-ND/2346086
S3: library part SPM15-050-Q12P-C, "DC/DC CONVERTER 5V 15W", Link=https://www.digikey.com/product-detail/en/murata-power-solutions-inc/SPM15-050-Q12P-C/811-2909-5-ND/4693860
S4: library part SPM15-033-Q12P-C, "DC/DC CONVERTER 3.3V 15W", Link=https://www.digikey.com/product-detail/en/murata-power-solutions-inc/SPM15-033-Q12P-C/811-2907-5-ND/4693858
SB1_Thermocouple_Amplifier1 SB1_Thermocouple_Amplifier2 SB1_Thermocouple_Amplifier3 SB1_Thermocouple_Amplifier4 SB2_Thermocouple_Amplifier1 SB2_Thermocouple_Amplifier2 SB2_Thermocouple_Amplifier3 SB2_Thermocouple_Amplifier4 SB3_Thermocouple_Amplifier1 SB3_Thermocouple_Amplifier2 SB3_Thermocouple_Amplifier3 SB3_Thermocouple_Amplifier4: library part Jumper, "Jumper Wire"
U2: library part BeagleBone_Black, "P9 Header of a BeagleBone Black"
U3 U4: "Imported", Type=Type
  U3: RefDes=RefDes
  U4: Manufacturer_Part_Number=ADR391AUJZ-R2, RefDes=Refdes, Vendor=Vendor
U5_Thermocouple_Amplifier1 U5_Thermocouple_Amplifier2 U5_Thermocouple_Amplifier3 U5_Thermocouple_Amplifier4: library part MAX31855x, Manufacturer PN=MAX31855EASA+, DigiKey PN=MAX31855EASA+-ND, Thermocouple Type=E
U6: "Imported", Manufacturer_Part_Number=ltc4151ims-1#pbf, C="Copyright (C) 2016 Accelerated Designs. All rights reserved", Copyright="Copyright (C) 2016 Accelerated Designs. All rights reserved", RefDes=RefDes, Type=Type, Vendor="Linear Technology"
U7_SolenoidDriver1 U7_SolenoidDriver2 U7_SolenoidDriver3 U7_SolenoidDriver4 U7_SolenoidDriver5: library part LT1910ES8#PBF, Manufacturer_Part_Number=lt1910es8#pbf, DigiKey PN=LT1910ES8#TRPBFCT-ND, RefDes=RefDes, Type=Type, Vendor="Linear Technology"
X1: "Crystal Oscillator", Frequency="8 MHz"

## Free pads (board coordinates)
  round 200 hole 116: MOUNT(1002,4550) MOUNT(1170,589) MOUNT(3638,2561) MOUNT(5700,4550) MOUNT(5760,600)

## Via types
v1: diameter 22, hole 12, Top to Bottom, tented both sides, 87 vias
v2: diameter 35, hole 25, Top to Bottom, tented both sides, 25 vias
v3: diameter 25, hole 15, Top to Bottom, tented both sides, 20 vias
v4: diameter 30, hole 20, Top to Bottom, tented both sides, 14 vias

## Nets (pads, with @x,y where several pads share a name; then routed paths per layer and width w, separated by ;. In a path a pad name is that pad's centre, name@x,y a point inside that pad or via, vN(x,y) a via of type N, cw(c..) or ccw(c..) an arc to the next point about the centre after c; other vN are vias at no path point)
3V3: C1.2 C2.2 C3.2 C4.2 C5.2 C6.2 C7.2 C19.2 C20.2 C22.2 C23.2 C35.2 C37_Thermocouple_Amplifier1.2 C37_Thermocouple_Amplifier2.2 C37_Thermocouple_Amplifier3.2 C37_Thermocouple_Amplifier4.2 FB1.2 J3.1 J3.2 J5.1 J6.1 J8.1 J8.5 R13.2 R17.1 R18.1 S4.3 U1.6 U1.11 U1.19 U1.28 U1.50 U1.75 U1.100 U3.21 U3.22 U4.1 U4.2 U5_Thermocouple_Amplifier1.4 U5_Thermocouple_Amplifier2.4 U5_Thermocouple_Amplifier3.4 U5_Thermocouple_Amplifier4.4 | length 2136.7
  Top w10: v1(1860,3531) 1894,3531 1900,3525 R13.2@1900,3492 ; R18.1@2199,2825 2199,2860 ; R17.1@2199,2892 2199,2860 ; v1(2251,2857) 2248,2860 2199,2860
  Bottom w10: v1(1090,3779) 1115.02,3804.02 U3.21@1148,3804.02 1210.02,3804.02 C23.2@1224,3818 ; U3.22@1148,3778.43 1204.23,3778.43 C20.2@1224,3758.67 ; C2.2@1375,3533.37 U1.100@1472.91,3533.37 ; v1(1447,2957) 1472.78,2957 C3.2@1511.78,2918 1539.83,2946.05 U1.75@1539.83,2994 ; U1.6@1638.26,3600.3 C1.2@1638.26,3705.13 ; C7.2@1708,3713 1713,3708 1713,3659.73 1736.69,3636.05 U1.11@1736.69,3600.3 ; C6.2@1846,3706.13 1846,3694 1894.17,3645.83 U1.19@1894.17,3600.3 1894.17,3547.17 1878,3531 v1(1860,3531) ; U1.50@2079.2,3060.93 2100.07,3060.93 C4.2@2152,3009 2121,3009 v1(2090,2978) ; U1.28@2079.2,3494 C5.2@2192.13,3494
  Bottom w15: C37_Thermocouple_Amplifier4.2@421,2623 452,2592 U5_Thermocouple_Amplifier4.4@514.95,2592 ; C37_Thermocouple_Amplifier3.2@421,2836 U5_Thermocouple_Amplifier3.4@514.95,2836 ; C37_Thermocouple_Amplifier2.2@421,3080 U5_Thermocouple_Amplifier2.4@514.95,3080 ; C37_Thermocouple_Amplifier1.2@421,3324 U5_Thermocouple_Amplifier1.4@514.95,3324 ; FB1.2@2148,3769.13 2148,3805
  Bottom w20: C35.2@1265,3909 U4.1@1265,3977.94 U4.2@1265,4015.35
  Bottom w30: C22.2@1224,3640 C19.2@1224,3699.33 C20.2@1224,3758.67 C23.2@1224,3818
5V: J1.3 J1.7 J1.11 J1.15 J1.19 J3.3 J3.4 S3.3 U2.5 U2.6 | length 100
  Top w20: U2.6@2477.13,4605.67 U2.5@2577.13,4605.67
24V: C38_SolenoidDriver1.2 C38_SolenoidDriver2.2 C38_SolenoidDriver3.2 C38_SolenoidDriver4.2 C38_SolenoidDriver5.2 J3.7 J3.8 R20_SolenoidDriver1.2 R20_SolenoidDriver2.2 R20_SolenoidDriver3.2 R20_SolenoidDriver4.2 R20_SolenoidDriver5.2 S1.7 S1.8 S2.7 S2.8 U7_SolenoidDriver1.8 U7_SolenoidDriver2.8 U7_SolenoidDriver3.8 U7_SolenoidDriver4.8 U7_SolenoidDriver5.8 | length 2876.4
  POWER w80: 3933.67,3195.67 J3.7@4119,3195.67 J3.8@4237.11,3195.67
  POWER w100: S2.8@2918,2225 2963,2225 3933.67,3195.67
  Bottom w20: R20_SolenoidDriver1.2@422,1670 459,1707 U7_SolenoidDriver1.8@526.72,1707 ; R20_SolenoidDriver2.2@1211,1665.28 1248,1702.28 U7_SolenoidDriver2.8@1315.72,1702.28 ; R20_SolenoidDriver3.2@1996,1665.28 2033,1702.28 U7_SolenoidDriver3.8@2100.72,1702.28 ; R20_SolenoidDriver4.2@2781,1665.28 2818,1702.28 U7_SolenoidDriver4.8@2885.72,1702.28 ; R20_SolenoidDriver5.2@3566,1665.28 3603,1702.28 U7_SolenoidDriver5.8@3670.72,1702.28
  Bottom w25: U7_SolenoidDriver1.8@526.72,1707 C38_SolenoidDriver1.2@526.72,1818 ; U7_SolenoidDriver2.8@1315.72,1702.28 C38_SolenoidDriver2.2@1315.72,1813.28 ; U7_SolenoidDriver3.8@2100.72,1702.28 C38_SolenoidDriver3.2@2100.72,1813.28 ; U7_SolenoidDriver4.8@2885.72,1702.28 C38_SolenoidDriver4.2@2885.72,1813.28 ; U7_SolenoidDriver5.8@3670.72,1702.28 C38_SolenoidDriver5.2@3670.72,1813.28
  other v2: 1090,1735.28 1170,1735.28 1875,1735.28 1955,1735.28 2660,1735.28 2740,1735.28 3445,1735.28 3525,1735.28 301,1740 381,1740 1050,1815.28 1130,1815.28 1210,1815.28 1835,1815.28 1915,1815.28 1995,1815.28 2620,1815.28 2700,1815.28 2780,1815.28 3405,1815.28 3485,1815.28 3565,1815.28 261,1820 341,1820 421,1820
36V: C8.2 C9.2 R14.2 R15.2 R16.2 S1.1 S2.1 S3.1 S4.1 U6.10 | length 7432.1
  Top w150: S1.1@275,225 458,408 914,408 1189,133 2826,133 S2.1@2918,225
  Bottom w10: 4328,550 U6.10@4328,716.92
  Bottom w20: R15.2@4278.69,508 R16.2@4278.69,616
  Bottom w30: C9.2@4722,827 4722,745 4723,744
  Bottom w100: 5114,582 5222,474 S3.1@5222,230
  Bottom w130: S4.1@5186,1427 5315,1298 5315,545
  Bottom w150: S1.1@275,225 458,408 914,408 1189,133 2826,133 S2.1@2918,225
  other v4: 4714,414 4864,414 5014,414 5164,414 5314,414 4789,564 4939,564 5089,564 5239,564 4714,714 4864,714 5014,714 5164,714 5314,714
BOOT0: R3.2 U1.94 | length 105.8
  Bottom w10: R3.2@1367.13,3415.26 U1.94@1472.91,3415.26
BOOT1: R4.2 U1.37 | length 109.8
  Bottom w10: U1.37@2079.2,3316.83 2185.13,3316.83 R4.2@2189,3317
Drain_SolenoidDriver1: Q1_SolenoidDriver1.2 R20_SolenoidDriver1.1 U7_SolenoidDriver1.6 | length 104.7
  Bottom w20: R20_SolenoidDriver1.1@422,1607 U7_SolenoidDriver1.6@526.72,1607
Drain_SolenoidDriver2: Q1_SolenoidDriver2.2 R20_SolenoidDriver2.1 U7_SolenoidDriver2.6 | length 104.7
  Bottom w20: R20_SolenoidDriver2.1@1211,1602.28 U7_SolenoidDriver2.6@1315.72,1602.28
Drain_SolenoidDriver3: Q1_SolenoidDriver3.2 R20_SolenoidDriver3.1 U7_SolenoidDriver3.6 | length 104.7
  Bottom w20: R20_SolenoidDriver3.1@1996,1602.28 U7_SolenoidDriver3.6@2100.72,1602.28
Drain_SolenoidDriver4: Q1_SolenoidDriver4.2 R20_SolenoidDriver4.1 U7_SolenoidDriver4.6 | length 104.7
  Bottom w20: R20_SolenoidDriver4.1@2781,1602.28 U7_SolenoidDriver4.6@2885.72,1602.28
Drain_SolenoidDriver5: Q1_SolenoidDriver5.2 R20_SolenoidDriver5.1 U7_SolenoidDriver5.6 | length 104.7
  Bottom w20: R20_SolenoidDriver5.1@3566,1602.28 U7_SolenoidDriver5.6@3670.72,1602.28
Gate_SolenoidDriver1: Q1_SolenoidDriver1.1 U7_SolenoidDriver1.5 | length 385.1
  Bottom w20: U7_SolenoidDriver1.5@526.72,1557 587,1557 606,1538 736,1408 Q1_SolenoidDriver1.1@850.06,1408
Gate_SolenoidDriver2: Q1_SolenoidDriver2.1 U7_SolenoidDriver2.5 | length 385.1
  Bottom w20: U7_SolenoidDriver2.5@1315.72,1552.28 1376,1552.28 1395,1533.28 1525,1403.28 Q1_SolenoidDriver2.1@1639.06,1403.29
Gate_SolenoidDriver3: Q1_SolenoidDriver3.1 U7_SolenoidDriver3.5 | length 385.1
  Bottom w20: U7_SolenoidDriver3.5@2100.72,1552.28 2161,1552.28 2180,1533.28 2310,1403.28 Q1_SolenoidDriver3.1@2424.06,1403.29
Gate_SolenoidDriver4: Q1_SolenoidDriver4.1 U7_SolenoidDriver4.5 | length 385.1
  Bottom w20: U7_SolenoidDriver4.5@2885.72,1552.28 2946,1552.28 2965,1533.28 3095,1403.28 Q1_SolenoidDriver4.1@3209.06,1403.29
Gate_SolenoidDriver5: Q1_SolenoidDriver5.1 U7_SolenoidDriver5.5 | length 385.1
  Bottom w20: U7_SolenoidDriver5.5@3670.72,1552.28 3731,1552.28 3750,1533.28 3880,1403.28 Q1_SolenoidDriver5.1@3994.06,1403.29